# Altium PCB BASE.PcbDoc (part 5 of 5)
Units mil, origin at the board's own origin, x right, y up, seen from the top; angles counter-clockwise.
Board outline 4330.71 x 3937.01 mil, 6 copper layers (Top, GND1, SIG1, PWR, GND2, Bottom), stack 32.112 mil thick; 57 components, 250 nets, 665 pads, 350 vias.
Unrouted connection lines stored in the file: 2.
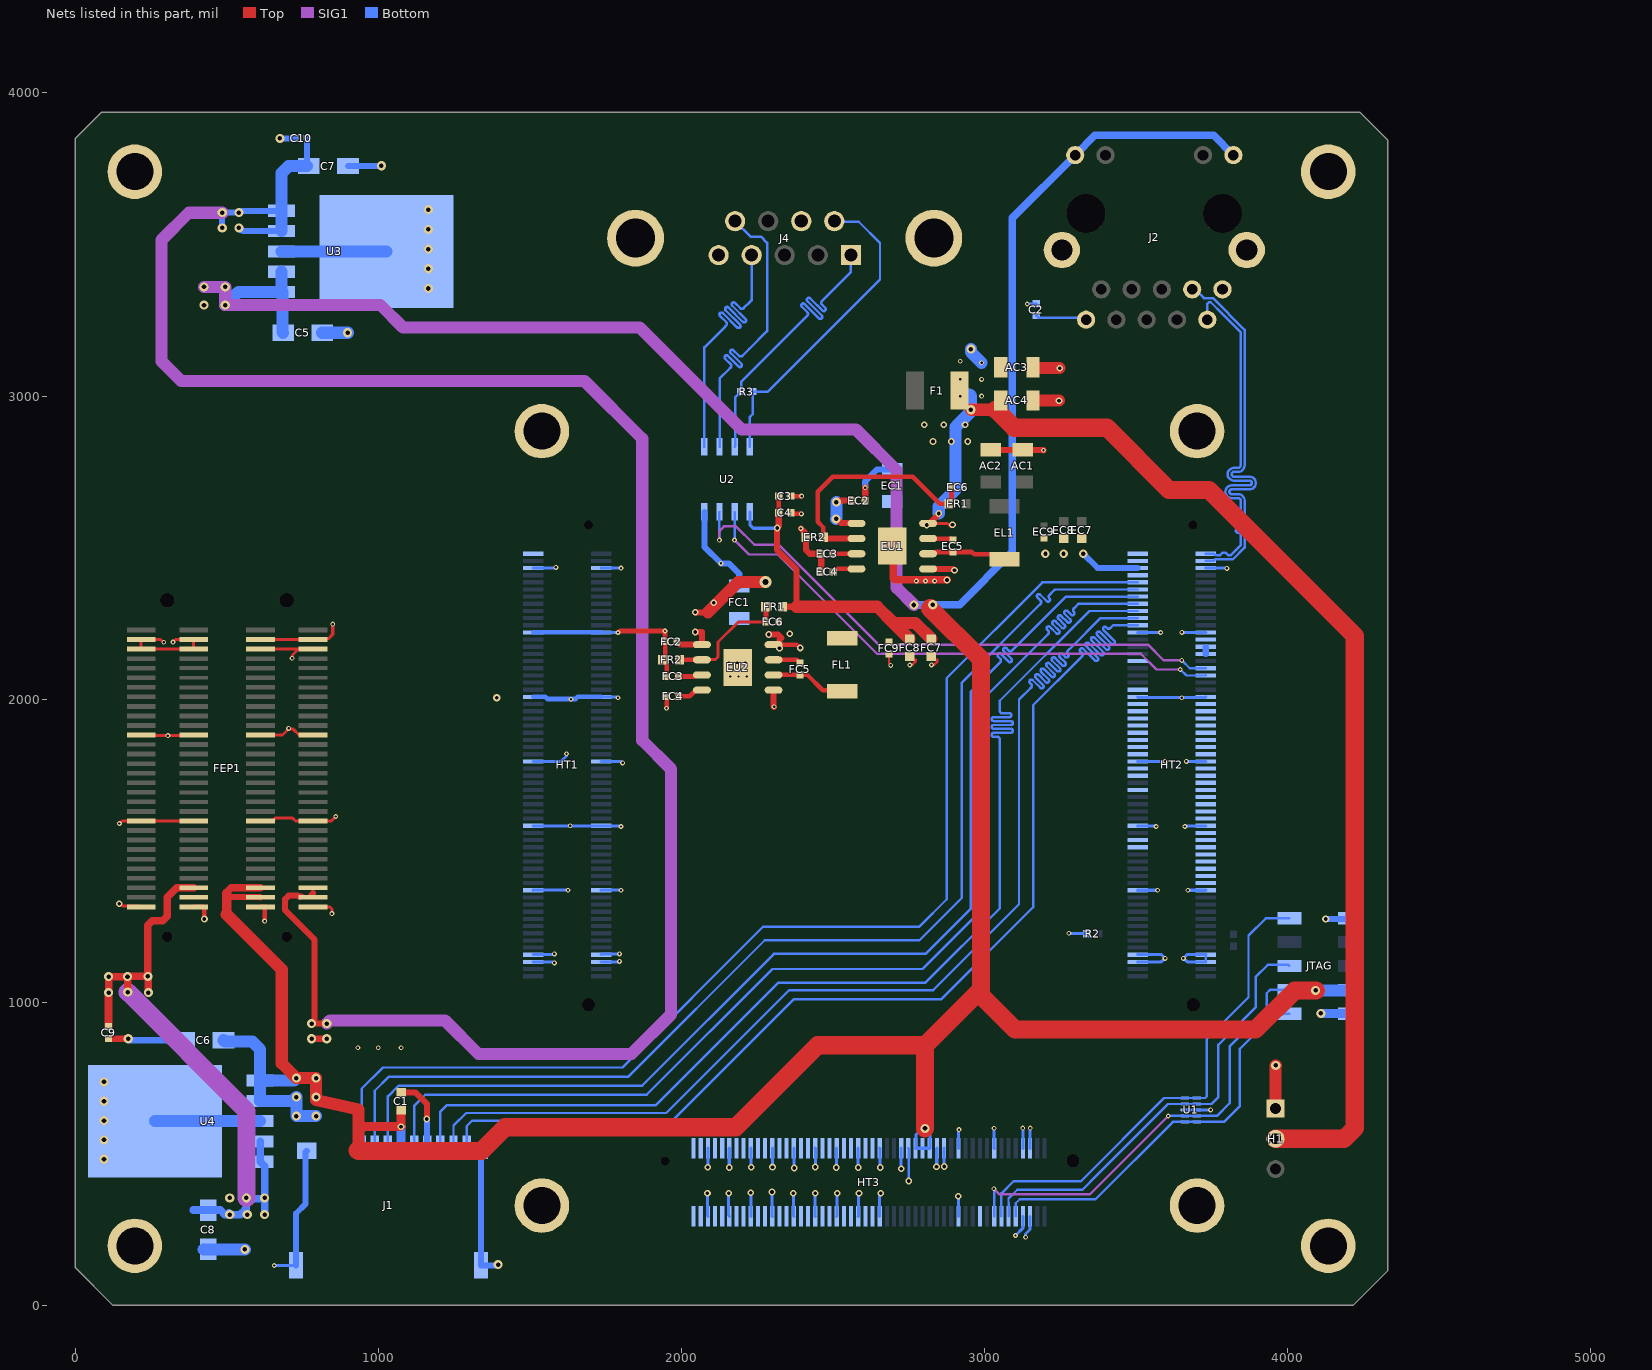
[diagram p9: the nets of this part, all layers, seen from the top]

## Via types
v1: diameter 16, hole 8, Top to Bottom, 219 vias
v2: diameter 30, hole 15, Top to Bottom, 75 vias
v3: diameter 22, hole 12, Top to Bottom, 48 vias
v4: diameter 28, hole 14, Top to Bottom, 3 vias
v5: diameter 39.37, hole 39.37, Top to Bottom, 2 vias
v6: diameter 24, hole 12, Top to Bottom, 2 vias
v7: diameter 40, hole 20, Top to Bottom, 1 vias

## Nets (pads, with @x,y where several pads share a name; then routed paths per layer and width w, separated by ;. In a path a pad name is that pad's centre, name@x,y a point inside that pad or via, vN(x,y) a via of type N, cw(c..) or ccw(c..) an arc to the next point about the centre after c; other vN are vias at no path point) (continued)
ETH-TD3_N: HT2.B60 J2.9 | length 1301.1
  Bottom w8: HT2.B60@3729.61,2480.08 3756.18,2480.08 3759.07,2477.19 3762,2477.19 3763.76,2475.44 3776.88,2475.44 3784.2,2482.75 3795.86,2482.75 3804.29,2474.32 3810.92,2474.32 3845.71,2509.12 3845.71,2537.44 3845.71,2541.44 ccw(c3837.71,2541.44) 3837.71,2549.44 3835.47,2549.44 cw(c3835.47,2555.94) 3835.47,2562.44 3839.21,2562.44 ccw(c3839.21,2568.94) 3839.21,2575.44 3835.47,2575.44 cw(c3835.47,2581.94) 3835.47,2588.44 3837.71,2588.44 ccw(c3837.71,2596.44) 3845.71,2596.44 3845.71,2615 3845.71,2623.35 3844.89,2624.18 3844.89,2645.26 3844.89,2655.67 ccw(c3836.89,2655.67) 3836.89,2663.67 3815.31,2663.67 cw(c3815.31,2684.49) 3794.49,2684.49 cw(c3815.31,2684.49) 3815.31,2705.32 3873.89,2705.32 ccw(c3873.89,2713.32) 3881.89,2713.32 ccw(c3873.89,2713.32) 3873.89,2721.32 3822.7,2721.32 cw(c3822.7,2742.14) 3801.87,2742.14 cw(c3822.7,2742.14) 3822.7,2762.96 3836.78,2762.96 ccw(c3836.78,2770.96) 3844.78,2770.96 3844.78,2795.81 3844.68,2795.91 3844.68,2809.02 3844.68,3211.03 3783.39,3272.31 3746.2,3309.51 3739.57,3309.51 3734.88,3304.83 J2.9@3734.88,3252.09
ETH-TD3_P: HT2.B59 J2.8 | length 1304
  Bottom w8: J2.8@3684.88,3352.09 3694.3,3352.09 3723.31,3323.08 3753.02,3323.08 3857.71,3218.39 3857.71,2809.02 3857.71,2795.91 3857.6,2795.81 3857.6,2770.96 cw(c3836.78,2770.96) 3836.78,2750.14 3822.7,2750.14 ccw(c3822.7,2742.14) 3814.7,2742.14 ccw(c3822.7,2742.14) 3822.7,2734.14 3873.89,2734.14 cw(c3873.89,2713.32) 3894.72,2713.32 cw(c3873.89,2713.32) 3873.89,2692.49 3815.31,2692.49 ccw(c3815.31,2684.49) 3807.31,2684.49 ccw(c3815.31,2684.49) 3815.31,2676.49 3836.89,2676.49 cw(c3836.89,2655.67) 3857.71,2655.67 3857.71,2645.26 3857.71,2500.03 3819.62,2461.94 3761.66,2461.94 3756.18,2456.46 HT2.B59@3729.61,2456.46
ETH_MDC: HT2.B38
ETH_MDIO: HT2.B39
ETHA_RXCK: HT2.B35
ETHA_RXCTL: HT2.B26
ETHA_RXD0: HT2.B27
ETHA_RXD1: HT2.B34
ETHA_RXD2: HT2.B28
ETHA_RXD3: HT2.B29
ETHA_TXCK: HT2.A38
ETHA_TXCTL: HT2.B37
ETHA_TXD0: HT2.B32
ETHA_TXD1: HT2.B33
ETHA_TXD2: HT2.A39
ETHA_TXD3: HT2.B36
ETHB_MDC: HT2.A19
ETHB_MDIO: HT2.A20
ETHB_RXCK: HT2.B30
ETHB_RXCTL: HT2.B14
ETHB_RXD0: HT2.B15
ETHB_RXD1: HT2.B16
ETHB_RXD2: HT2.B17
ETHB_RXD3: HT2.B18
ETHB_TXCK: HT2.B21
ETHB_TXCTL: HT2.B25
ETHB_TXD0: HT2.B19
ETHB_TXD1: HT2.B20
ETHB_TXD2: HT2.B23
ETHB_TXD3: HT2.B24
GND: AC1.1 AC2.1 AC3.1 AC4.1 C1.2 C2.1 C3.2 C4.2 C5.2 C6.2 C7.2 C8.2 C9.1 C10.1 EC1.1 EC2.1 EC3.1 EC4.1 EC7.1 EC8.1 EC9.1 ER2.1 EU1.5 EU1.9 EU2.5 EU2.9 FC1.1 FC2.1 FC3.1 FC4.1 FC7.1 FC8.1 FC9.1 FEP1.A2 FEP1.A3 FEP1.A12 FEP1.A21 FEP1.A30 FEP1.B2 FEP1.B3 FEP1.B12 FEP1.B21 FEP1.B30 FEP1.C2 FEP1.C3 FEP1.C12 FEP1.C21 FEP1.C30 FEP1.D2 FEP1.D3 FEP1.D12 FEP1.D21 FEP1.D30 FR2.1 H1.1 HT1.A3 HT1.A4 HT1.A13 HT1.A22 HT1.A31 HT1.A40 HT1.A49 HT1.A58 HT1.B3 HT1.B4 HT1.B13 HT1.B22 HT1.B31 HT1.B40 HT1.B49 HT1.B58 HT2.A3 HT2.A4 HT2.A13 HT2.A22 HT2.A31 HT2.A40 HT2.A49 HT2.A58 HT2.B3 HT2.B4 HT2.B13 HT2.B22 HT2.B31 HT2.B40 HT2.B49 HT2.B58 HT3.A3 HT3.A4 HT3.A13 HT3.A24 HT3.A27 HT3.A30 HT3.A33 HT3.A36 HT3.A39 HT3.A42 HT3.A45 HT3.A48 HT3.B3 HT3.B4 HT3.B8 HT3.B13 HT3.B15 HT3.B16 HT3.B20 HT3.B21 HT3.B24 HT3.B27 HT3.B30 HT3.B33 HT3.B36 HT3.B39 HT3.B42 HT3.B45 HT3.B48 J1.0 J1.6 J1.10 J1.11 J1.12 J2.10 J2.15 J2.16 J4.5 J4.7 J4.10 J4.11 JTAG.2 JTAG.10 pad.19 pad.20 pad.21 pad.22 pad.C1 pad.C2 pad.C3 pad.C4 R2.2 U1.3 U1.8 U2.4 U3.3 U3.6 U4.3 U4.6 | length 12165.5
  Top w8: FC9.1@2684.61,2149.17 2684.61,2119.64 2690.61,2113.64 v1(2690.61,2111.48) ; FC8.1@2752.52,2141.46 2763.28,2130.69 2772.27,2130.69 2772.27,2125.04 2760.01,2112.78 v1(2753.45,2112.78) ; FC7.1@2824.61,2141.46 2835.38,2130.69 2844.36,2130.69 2844.36,2125.04 2832.63,2113.3 v1(2824.9,2113.3)
  Top w10: v3(145.71,1325) 148.96,1325 156.12,1317.83 214.61,1317.83 FEP1.D30@217.48,1314.96 ; v1(145.71,1590) 154.13,1598.43 FEP1.D21@217.48,1598.43 FEP1.C21@390.71,1598.43 ; FEP1.D12@217.48,1881.89 218.43,1880.94 389.76,1880.94 FEP1.C12@390.71,1881.89 ; v1(292.16,2187.98) 290.53,2187.98 281.66,2196.85 FEP1.D2@217.48,2196.85 FEP1.D3@217.48,2165.35 FEP1.C3@390.71,2165.35 FEP1.C2@390.71,2196.85 331.41,2196.85 322.92,2188.36 v1(322.78,2188.36) ; FEP1.B21@611.18,1598.43 650.55,1598.43 659.88,1607.75 717.66,1607.75 726.99,1598.43 FEP1.A21@784.41,1598.43 844.91,1598.43 v1(859.55,1613.07) ; FEP1.B12@611.18,1881.89 683.82,1881.89 703.99,1902.06 v1(703.99,1903.68) 705.14,1902.54 717.82,1902.54 740.3,1880.05 782.57,1880.05 FEP1.A12@784.41,1881.89 ; FEP1.B3@611.18,2165.35 736.53,2165.35 ; FEP1.B2@611.18,2196.85 FEP1.A2@784.41,2196.85 787.28,2199.72 835.43,2199.72 849.67,2213.96 v1(849.67,2247.6) ; v1(715.71,2135) 716.86,2136.15 716.86,2145.68 736.53,2165.35 ; FEP1.A30@784.41,1314.96 784.98,1314.39 840.17,1314.39 846.89,1307.67 v1(846.89,1292.75) ; FEP1.A3@784.41,2165.35 736.53,2165.35
  Top w15: FEP1.C30@390.71,1314.96 424.08,1314.96 427.66,1311.38 426.32,1310.04 v3(426.32,1274.81) ; FEP1.B30@611.18,1314.96 629.37,1314.96 629.75,1314.59 624.87,1309.71 v1(624.87,1268.06) ; v1(1790.71,2220) 1790.98,2220 1795.98,2225 v1(1945.71,2225) 1945.71,2190.31 FC2.1@1946.02,2190 1946.02,2139.84 1937.17,2130.98 FR2.1@1937.17,2130 1937.17,2129.02 1951.02,2115.16 FC3.1@1951.02,2075 ; v1(1950.71,1970) 1951.02,1970.31 FC4.1@1951.02,2010 ; C4.2@2360.39,2615 2363.89,2611.5 v1(2395.65,2611.5) ; C3.2@2360.39,2670 C3.2@2360.39,2670 v1(2396.53,2669.96)
  Top w20: C9.1@110,880.31 110.31,880 v2(175,880) ; C1.2@1075,702.09 1122.91,702.09 1160,665 v3(1160,615) ; EU2.5@2303.82,2030 2303.82,1976.89 v1(2305.71,1975) ; v1(2393.9,2563.13) 2406.69,2550.34 2406.69,2539.76 ER2.1@2411.46,2535 2411.46,2491.72 2423.17,2480 EC3.1@2461.02,2480 2461.18,2479.84 2461.18,2420.16 EC4.1@2461.34,2420 ; EC2.1@2605.39,2655 2606.35,2655.95 v1(2606.35,2698.16) ; EU1.5@2813.82,2430 2895.71,2430 v3(2900.71,2425) ; AC2.1@3020.71,2822.83 AC1.1@3125.71,2822.83 3192.87,2822.83 v1(3194.29,2821.42)
  Top w25: EU1.9@2695.71,2505 2698.21,2502.5 2698.21,2398.85 2703.61,2393.45 v3(2876.02,2393.45)
  Top w40: AC4.1@3159.61,2985.47 3245.24,2985.47 v3(3245.71,2985) ; AC3.1@3159.61,3095.47 3159.61,3091.65 3161.26,3090 3163.56,3092.3 v3(3247.63,3092.3) ; H1.1@3960,650 3960,659.23 3959.7,659.53 3959.7,790.85 v2(3960.67,791.81)
  Bottom w8: HT3.B20@2748.5,518.66 2750.21,516.95 v3(2750.21,410.47) ; v1(3140.85,3303.88) 3141.66,3304.69 C2.1@3170.71,3304.69 ; HT2.B3@3729.61,1133.62 HT2.B4@3729.61,1157.24
  Bottom w10: v1(656.77,131.77) 657.36,132.36 J1.11@728.46,132.36 ; HT1.A3@1510.71,1133.62 1575.46,1133.62 1579.09,1130 v1(1580.71,1130) ; HT1.A4@1510.71,1157.24 1576.33,1157.24 1579.09,1160 v1(1580.71,1160) ; HT1.A13@1510.71,1369.84 1510.79,1369.92 1625.63,1369.92 v1(1625.71,1370) ; HT1.A22@1510.71,1582.44 HT1.B22@1735.12,1582.44 1798.27,1582.44 v1(1800.71,1580) ; HT1.A31@1510.71,1795.04 1603.03,1795.04 1620.71,1812.72 v1(1620.71,1820) ; HT1.A58@1510.71,2432.83 1581.92,2432.83 1584.09,2435 v1(1585.71,2435) ; HT1.B3@1735.12,1133.62 1794.33,1133.62 v1(1795.71,1135) ; HT1.B4@1735.12,1157.24 1736.73,1158.85 1794.56,1158.85 v1(1795.71,1160) ; HT1.B13@1735.12,1369.84 1735.2,1369.92 1800.63,1369.92 v1(1800.71,1370) ; HT1.B31@1735.12,1795.04 1799.05,1795.04 1804.09,1790 v1(1805.71,1790) ; HT1.B40@1735.12,2007.64 1786.45,2007.64 1789.09,2005 v1(1790.71,2005) ; HT1.B49@1735.12,2220.24 1735.24,2220.12 1790.59,2220.12 v1(1790.71,2220) ; HT1.B58@1735.12,2432.83 1735.27,2432.69 1800.35,2432.69 v1(1800.5,2432.54) ; v3(2085.71,370) 2086.4,369.31 2086.4,294.94 HT3.A48@2087.09,294.25 ; v3(2086.78,456.49) 2086.94,456.64 2086.94,518.51 HT3.B48@2087.09,518.66 ; v3(2155.53,370.78) 2155.53,296.68 HT3.A45@2157.95,294.25 ; v3(2157.52,455.2) 2157.74,455.41 2157.74,518.44 HT3.B45@2157.95,518.66 ; HT3.A42@2228.82,294.25 v3(2228.79,371.52) ; HT3.B42@2228.82,518.66 2229.29,518.19 2229.29,456.44 v3(2229.75,455.97) ; v3(2298.81,374.14) 2297.97,373.29 2297.97,295.97 HT3.A39@2299.68,294.25 ; HT3.B39@2299.68,518.66 2300.07,518.27 2300.07,456.99 v3(2300.46,456.6) ; v3(2369.04,370) 2369.8,369.25 2369.8,295.01 HT3.A36@2370.55,294.25 ; HT3.B36@2370.55,518.66 2371.49,517.72 2371.49,454.41 v3(2372.43,453.47) ; v3(2441.26,370) v3(2441.26,370) 2441.34,294.33 HT3.A33@2441.42,294.25 ; HT3.B33@2441.42,518.66 2441.65,518.43 2441.65,457.15 v3(2441.89,456.91) ; v3(2510.15,455) 2510.15,456.62 2512.28,458.75 HT3.B30@2512.28,518.66 ; HT3.A30@2512.28,294.25 2512.88,294.85 2512.88,369.4 v3(2513.49,370) ; v3(2582.93,455) 2583.04,455.11 2583.04,518.55 HT3.B27@2583.15,518.66 ; HT3.A27@2583.15,294.25 2584.56,295.66 2584.56,368.85 v3(2585.71,370) ; HT3.A24@2654.02,294.25 2654.02,364.46 2657.93,368.38 v3(2657.93,370) ; HT3.B24@2654.02,518.66 2654.86,517.81 2654.86,455.85 v3(2655.71,455) ; v3(2724.68,451.43) 2724.64,451.47 2724.64,518.42 HT3.B21@2724.88,518.66 ; v3(2841.53,457.36) 2842.26,458.09 2842.26,517.93 HT3.B16@2842.99,518.66 ; v3(2866.5,458.42) 2866.56,458.47 HT3.B15@2866.61,518.66 HT3.B15@2866.61,518.66 ; v3@2910.71,360 2913.86,356.85 HT3.A13@2913.86,294.25 ; HT3.B13@2913.86,518.66 2913.86,578.15 v1(2915.71,580) ; v1(3031.62,584.74) 3031.8,584.57 3031.8,518.83 HT3.B8@3031.97,518.66 ; v1(3102.14,230.84) 3126.08,254.78 3126.08,293.88 HT3.A4@3126.46,294.25 ; v1(3125.71,585) 3126.08,584.63 3126.08,519.04 HT3.B4@3126.46,518.66 ; v1(3135.32,224.97) 3135.32,235.76 3150.08,250.52 HT3.A3@3150.08,294.25 ; HT3.B3@3150.08,518.66 3150.39,518.98 3150.39,584.68 v1(3150.71,585) ; v1(3278.38,1227.73) 3278.97,1227.14 3336.67,1227.14 R2.2@3337.26,1226.56 ; HT2.A3@3505.2,1133.62 3582.71,1133.62 3594.09,1145 v1(3595.71,1145) 3583.46,1157.24 HT2.A4@3505.2,1157.24 ; HT2.A13@3505.2,1369.84 3570.55,1369.84 v1(3570.71,1370) ; HT2.A22@3505.2,1582.44 3563.27,1582.44 v1(3565.71,1580) ; HT2.A31@3505.2,1795.04 v1@3595.69,1795.02 ; HT2.A40@3505.2,2007.64 3506.69,2006.15 3649.56,2006.15 v1(3650.71,2005) 3651.86,2006.15 3728.12,2006.15 HT2.B40@3729.61,2007.64 ; HT2.A49@3505.2,2220.24 3505.31,2220.12 3580.59,2220.12 v1(3580.71,2220) ; v1@3650.71,2220 v1(3650.94,2220.24) HT2.B49@3729.61,2220.24 ; v1(3660.71,1580) 3663.15,1582.44 HT2.B22@3729.61,1582.44 ; U1.3@3661.02,645 U1.8@3700.39,645 v1(3745.71,645) ; v1(3665.71,1795) 3665.75,1795.04 HT2.B31@3729.61,1795.04 ; v1(3670.71,1370) 3670.87,1369.84 HT2.B13@3729.61,1369.84 ; HT2.B3@3729.61,1133.62 3668.71,1133.62 3657.33,1145 v1(3655.71,1145) 3667.95,1157.24 HT2.B4@3729.61,1157.24 ; HT2.B58@3729.61,2432.83 3797.87,2432.83 v1@3800.71,2430
  Bottom w15: HT1.A40@1510.71,2007.64 1550.25,2007.64 1557.1,2000.79 1651.49,2000.79 1658.35,2007.64 HT1.B40@1735.12,2007.64 ; HT1.A49@1510.71,2220.24 HT1.B49@1735.12,2220.24
  Bottom w20: v2(175,880) 177.71,880 182.71,875 C6.2@360,875 ; v2(675,3850) C10.1@725.32,3850 ; J1.11@728.46,132.36 728.46,303.46 760,335 760,506.42 J1.12@763.9,510.32 ; C7.2@900,3759 1009,3759 v2(1010,3760) ; v3(1160,615) 1160.38,614.62 1160.38,531.15 J1.6@1161.54,530 ; J1.10@1338.7,510.32 J1.0@1338.7,132.36 1392.36,132.36 v2(1395,135) ; U2.4@2075.71,2617.75 2075.71,2502.74 v1(2130.55,2447.9) 2156.09,2447.9 2190.71,2413.28 FC1.1@2190.71,2373.15 ; v1(2606.35,2698.16) 2606.35,2718.55 2645.94,2758.15 EC1.1@2695.71,2758.15 ; v4(3325.71,2480) 3372.87,2432.83 HT2.A58@3505.2,2432.83 ; v6(4125.71,1275) 4203.23,1275 JTAG.10@4205.71,1277.48
  Bottom w30: v2(4109.25,963.35) 4204.88,963.35 JTAG.2@4205.71,962.52
  Bottom w40: U4.6@263.5,608 U4.3@610,608 ; C8.2@424,185 v2(560,185) ; U3.3@680.72,3477.23 U3.6@1027.22,3477.23 ; C5.2@815,3209 v2(899,3209)
  other v1: 932.77,850.08 1000,850 1075,850 1633.05,1582.84 3595.71,1795 305.71,1880 1635.71,2000 2160.71,2075 2188.21,2075 2215.71,2075 2155.71,2120 2183.4,2120 2211.09,2120 2775,2390 2805,2390 2835,2390 3799.29,2431.42
  other v2: 95,482.5 95,546.25 95,610 95,673.75 95,737.5 1165,3355 1165,3420 1165,3485 1165,3550 1165,3615
  other v3: 2912.76,360.39
  other v4: 3200.71,2480 3260.71,2480
  other v6: 1390.71,2005
H1_HPD: HT1.A60
HDMI1_FPGA_CLK_N: HT2.A36
HDMI1_FPGA_CLK_P: HT2.A37
HDMI1_FPGA_D0_N: HT2.A29
HDMI1_FPGA_D0_P: HT2.A30
HDMI1_FPGA_D1_N: HT2.A32
HDMI1_FPGA_D1_P: HT2.A33
HDMI1_FPGA_D2_N: HT2.A34
HDMI1_FPGA_D2_P: HT2.A35
LED5: HT2.A41
MGT112CLK0_N: HT3.B49
MGT112CLK0_P: HT3.B50
NetC2_2: C2.2 J2.1 | length 169.7
  Bottom w8: C2.2@3170.71,3265.31 3177.32,3258.7 3328.27,3258.7 J2.1@3334.88,3252.09
NetEC3_2: EC3.2 EU1.3 | length 77.2
  Top w15: EC3.2@2500.39,2480 EU1.3@2577.6,2480
NetEC4_2: EC4.2 EU1.4 | length 81
  Top w15: EC4.2@2500.71,2420 2510.71,2430 EU1.4@2577.6,2430
NetEC5_1: EC5.1 EU1.7 | length 84
  Top w15: EU1.7@2813.82,2530 2890.71,2530 EC5.1@2895.71,2525
NetEC5_2: EC5.2 EL1.1 EU1.6 | length 264.3
  Top w15: EU1.6@2813.82,2480 2833.87,2480 2839.5,2485.63 EC5.2@2895.71,2485.63 2957.57,2485.63 2965.66,2477.54 3049.59,2477.54 EL1.1@3065.71,2461.42
NetEC6_1: EC6.1 ER1.2 ER2.2 EU1.2 | length 816.6
  Top w15: ER2.2@2468.54,2535 2468.54,2566.46 2450,2585 2450,2685 2499.48,2734.48 2762.47,2734.48 2852.24,2644.71 2881.88,2644.71 ER1.2@2882.17,2645 ; ER1.2@2882.17,2645.98 2889.43,2653.25 2889.43,2660.63 2890.83,2662.03 2890.83,2695.69 2891.02,2695.88 EC6.1@2891.02,2700
  Top w20: ER2.2@2468.54,2535 2468.54,2534.76 2473.31,2530 EU1.2@2577.6,2530
NetEU2_2: EU2.2 FC6.1 FR1.2 FR2.2 | length 418.1
  Top w10: EU2.2@2068.81,2131.21 2112.02,2131.21 2120.81,2140 2120.81,2188.48 2187.33,2255 FC6.1@2280.71,2255
  Top w15: FR2.2@1994.25,2130 EU2.2@2067.6,2130 EU2.2@2068.81,2131.21 ; FR1.2@2277.17,2305 2278.94,2303.23 2278.94,2256.77 FC6.1@2280.71,2255
NetEU2_3: EU2.3 FC3.2 | length 79.3
  Top w15: FC3.2@1990.39,2075 2042.55,2075 2047.55,2080 EU2.3@2067.6,2080
NetEU2_4: EU2.4 FC4.2 | length 85.5
  Top w15: FC4.2@1990.39,2010 2027.55,2010 2047.55,2030 EU2.4@2067.6,2030
NetEU2_6: EU2.6 FC5.2 FL1.1 | length 249.1
  Top w15: EU2.6@2303.82,2080 FC5.2@2390.71,2080 2415.71,2080 2466.21,2029.5 2527.62,2029.5 FL1.1@2530.71,2026.42
NetEU2_7: EU2.7 FC5.1 | length 91.3
  Top w15: EU2.7@2303.82,2130 2380.08,2130 FC5.1@2390.71,2119.37
OTG-ID: HT2.A57
OTG-RESETN: HT2.B48
PCIE_CLK_N: HT3.A49
PCIE_CLK_P: HT3.A50
PCIE_PG: HT2.A27
PCIE_RX0_N: HT3.B37
PCIE_RX0_P: HT3.B38
PCIE_RX1_N: HT3.B40
PCIE_RX1_P: HT3.B41
PCIE_RX2_N: HT3.B43
PCIE_RX2_P: HT3.B44
PCIE_RX3_N: HT3.B46
PCIE_RX3_P: HT3.B47
PCIE_TX0_N: HT3.A37
PCIE_TX0_P: HT3.A38
PCIE_TX1_N: HT3.A40
PCIE_TX1_P: HT3.A41
PCIE_TX2_N: HT3.A43
PCIE_TX2_P: HT3.A44
PCIE_TX3_N: HT3.A46
PCIE_TX3_P: HT3.A47
PS_RST: HT2.A45
RXD+: J4.6 R3.1 U2.8 | length 1060.3
  Bottom w8: U2.8@2225.71,2832.25 2225.71,2931.31 2235.08,2940.69 R3.1@2235.08,3015 2285,3015 2655,3385 2655,3505 2585,3575 2506.18,3575 J4.6@2504.29,3576.89
RXD-: J4.1 R3.2 U2.7 | length 1060
  Bottom w8: U2.7@2175.71,2832.25 2177.78,2834.32 2177.78,2997.07 R3.2@2195.71,3015 ; R3.2@2196.67,3015.96 2196.67,3046.67 2412.5,3262.5 2415.33,3265.33 ccw(c2409.67,3270.99) 2415.33,3276.64 2397.3,3294.67 cw(c2401.89,3299.27) 2406.49,3303.87 2453.87,3256.49 ccw(c2458.46,3261.09) 2463.06,3265.68 2415.68,3313.06 cw(c2420.28,3317.65) 2424.87,3322.25 2464.84,3282.29 ccw(c2469.43,3286.89) 2474.03,3291.48 2463.41,3302.1 cw(c2469.07,3307.76) 2463.41,3313.41 2490,3340 2558.82,3408.82 J4.1@2558.82,3465.08
SATA1_RX_N: HT3.B31
SATA1_RX_P: HT3.B32
SATA1_TX_N: HT3.A31
SATA1_TX_P: HT3.A32
SATA2_RX_N: HT3.B34
SATA2_RX_P: HT3.B35
SATA2_TX_N: HT3.A34
SATA2_TX_P: HT3.A35
SD_CD_L: HT2.A50 J1.9 | length 3864
  Bottom w8: J1.9@1291.46,530 1291.46,591.46 1310,610 1970,610 2370,1010 2856.49,1010 3160,1313.51 3160,1980 3318.13,2138.13 3320.96,2140.96 ccw(c3315.3,2146.62) 3320.96,2152.27 3316.31,2156.92 cw(c3320.9,2161.52) 3325.5,2166.12 3363.71,2127.9 ccw(c3368.31,2132.5) 3372.9,2137.1 3334.69,2175.31 cw(c3339.29,2179.9) 3343.88,2184.5 3382.1,2146.29 ccw(c3386.69,2150.88) 3391.29,2155.48 3353.08,2193.69 cw(c3357.67,2198.29) 3353.08,2202.89 cw(c3357.67,2198.29) 3362.27,2202.89 3400.48,2164.67 ccw(c3405.08,2169.27) 3409.67,2173.86 3371.46,2212.08 cw(c3376.06,2216.67) 3380.65,2221.27 3418.87,2183.06 ccw(c3423.46,2187.65) 3428.06,2192.25 3392.48,2227.82 cw(c3397.08,2232.42) 3401.68,2237.02 3403.69,2235 ccw(c3409.35,2240.66) 3415,2235 3423.86,2243.86 3437.4,2243.86 HT2.A50@3505.2,2243.86
SFPA_RD_N: HT3.B28
SFPA_RD_P: HT3.B29
SFPA_TD_N: HT3.A28
SFPA_TD_P: HT3.A29
SFPB_RD_N: HT3.B25
SFPB_RD_P: HT3.B26
SFPB_TD_N: HT3.A25
SFPB_TD_P: HT3.A26
TCK_JTAG: HT3.A5 JTAG.1 U1.1 U1.10 | length 1315.2
  Bottom w8: HT3.A5@3102.83,294.25 3102.83,337.13 3115.94,350.23 3365.94,350.23 3621.34,605.63 U1.1@3661.02,605.63 U1.10@3700.39,605.63 3789.84,605.63 3842.49,658.28 3842.49,846.78 3958.23,962.52 JTAG.1@4005.71,962.52
TDI_JTAG: HT3.A7 JTAG.9 U1.5 U1.6 | length 1631.9
  Bottom w8: HT3.A7@3055.59,294.25 3055.59,369.88 3095.53,409.82 3317.69,409.82 3592.24,684.37 U1.5@3661.02,684.37 3728.1,684.37 3733.17,689.43 3733.17,879.08 3870.75,1016.66 3870.75,1220.04 3928.19,1277.48 JTAG.9@4005.71,1277.48
TDO_JTAG: HT3.A8 JTAG.3 U1.2 U1.9 | length 1494.5
  SIG1 w8: v1(3030.71,385) 3049.3,366.41 3347.12,366.41 v1(3605.71,625)
  Bottom w8: v1(3030.71,385) 3031.97,383.74 HT3.A8@3031.97,294.25 ; v1(3605.71,625) 3606.02,625.31 U1.2@3661.02,625.31 U1.9@3700.39,625.31 3766.63,625.31 3808.44,667.12 3808.44,854.06 3930.71,976.33 3930.71,1030 3941.97,1041.26 JTAG.3@4005.71,1041.26
TF_CLK: HT2.A53 J1.5 | length 3864
  Bottom w8: J1.5@1118.23,530 1118.23,658.23 1155,695 1885,695 2300,1110 2795,1110 2995,1310 2995,2000 3206.84,2211.84 3209.67,2214.67 ccw(c3204.01,2220.33) 3209.67,2225.98 3206.66,2229 cw(c3211.25,2233.59) 3215.85,2238.19 3236.26,2217.78 ccw(c3240.86,2222.37) 3245.46,2226.97 3225.04,2247.38 cw(c3229.64,2251.98) 3234.23,2256.58 3254.65,2236.16 ccw(c3259.24,2240.76) 3263.84,2245.36 3243.43,2265.77 cw(c3248.02,2270.36) 3243.43,2274.96 cw(c3248.02,2270.36) 3252.62,2274.96 3273.03,2254.55 ccw(c3277.63,2259.14) 3282.22,2263.74 3264.56,2281.41 cw(c3269.15,2286) 3273.75,2290.6 3285.33,2279.02 ccw(c3289.93,2283.61) 3294.52,2288.21 cw(c3300.18,2293.87) 3294.52,2299.52 3308.44,2313.44 3309.72,2314.72 HT2.A53@3505.2,2314.72
TF_CMD: HT2.A54 J1.3 | length 3857.8
  Bottom w8: J1.3@1031.61,530 1031.61,690 1066.61,725 1870,725 2305,1160 2805,1160 2955,1310 2955,2025 3049.11,2119.11 3051.94,2121.94 ccw(c3046.29,2127.6) 3051.94,2133.26 3044.91,2140.29 cw(c3049.51,2144.89) 3054.1,2149.48 3079.33,2124.26 ccw(c3083.93,2128.85) 3088.52,2133.45 3063.3,2158.67 cw(c3067.89,2163.27) 3072.49,2167.87 3079.52,2160.83 ccw(c3085.18,2166.49) 3090.83,2160.83 3114.11,2184.11 3268.35,2338.35 HT2.A54@3505.2,2338.35
TF_DAT0: HT2.A52 J1.7 | length 3864
  Bottom w8: J1.7@1204.84,530 1204.84,640 1224.84,660 1915,660 2320,1065 2805,1065 3050,1310 3050,1864 3050,1868 ccw(c3042,1868) 3042,1876 3030,1876 cw(c3030,1882.5) 3030,1889 3086.83,1889 ccw(c3086.83,1895.5) 3086.83,1902 3030,1902 cw(c3030,1908.5) 3030,1915 3086.83,1915 ccw(c3086.83,1921.5) 3086.83,1928 3030,1928 cw(c3030,1934.5) 3030,1941 3081.75,1941 ccw(c3081.75,1947.5) 3081.75,1954 3058,1954 cw(c3058,1962) 3050,1962 3050,1995 3346.1,2291.1 HT2.A52@3505.2,2291.1
TF_DAT1: HT2.A51 J1.8 | length 3864
  Bottom w8: J1.8@1248.15,530 1248.15,593.15 1290,635 1950,635 2355,1040 2830,1040 3113.65,1323.65 3113.65,1998.65 3150.7,2035.7 3153.53,2038.53 ccw(c3147.87,2044.19) 3153.53,2049.84 3149.94,2053.44 cw(c3154.53,2058.03) 3159.13,2062.63 3183.65,2038.11 ccw(c3188.25,2042.7) 3192.84,2047.3 3168.32,2071.82 cw(c3172.92,2076.42) 3177.51,2081.01 3202.04,2056.49 ccw(c3206.63,2061.09) 3211.23,2065.68 3186.71,2090.21 cw(c3191.3,2094.8) 3186.71,2099.4 cw(c3191.3,2094.8) 3195.9,2099.4 3220.42,2074.88 ccw(c3225.02,2079.47) 3229.61,2084.07 3205.09,2108.59 cw(c3209.69,2113.19) 3214.28,2117.78 3238.81,2093.26 ccw(c3243.4,2097.86) 3248,2102.45 3223.48,2126.98 cw(c3228.07,2131.57) 3232.67,2136.17 3257.19,2111.65 ccw(c3261.79,2116.24) 3266.38,2120.84 3247.62,2139.6 cw(c3252.21,2144.2) 3256.81,2148.8 3265.96,2139.65 ccw(c3270.56,2144.24) 3275.15,2148.84 cw(c3280.81,2154.5) 3275.15,2160.15 3289.42,2174.42 3382.48,2267.48 HT2.A51@3505.2,2267.48
TF_DAT2: HT2.A56 J1.1 | length 3864.8
  Bottom w8: J1.1@945,530 945,715 1015,785 1805,785 2270,1250 2785,1250 2875,1340 2875,2070 3190.59,2385.59 HT2.A56@3505.2,2385.59
TF_DAT3: HT2.A55 J1.2 | length 3864
  Bottom w8: J1.2@988.31,530 988.31,708.31 1035,755 1825,755 2275,1205 2785,1205 2925,1345 2925,2055 3181.59,2311.59 3184.42,2314.42 ccw(c3178.76,2320.08) 3184.42,2325.73 3174.54,2335.61 cw(c3179.13,2340.21) 3183.73,2344.81 3204.93,2323.61 ccw(c3209.52,2328.21) 3214.12,2332.8 cw(c3219.77,2338.46) 3214.12,2344.12 3230,2360 3231.97,2361.97 HT2.A55@3505.2,2361.97
TMS_JTAG: HT3.A6 JTAG.5 U1.4 U1.7 | length 1466.3
  Bottom w8: HT3.A6@3079.21,294.25 3079.21,339.72 3079.02,339.91 3079.02,353.31 3107.7,381.99 3322.7,381.99 3370.71,430 3605.39,664.68 U1.4@3661.02,664.68 U1.7@3700.39,664.68 3748.34,664.68 3771.25,687.6 3771.25,860.2 3894,982.95 3894,1083.53 3933.95,1123.48 4002.23,1123.48 JTAG.5@4005.71,1120
TXD+: J4.4 U2.5 | length 1060
  Bottom w8: U2.5@2075.71,2832.25 2075.71,3160.71 2145,3230 2147.83,3232.83 ccw(c2142.17,3238.49) 2147.83,3244.14 2127.3,3264.67 cw(c2131.89,3269.27) 2136.49,3273.87 2183.87,3226.49 ccw(c2188.46,3231.09) 2193.06,3235.68 2145.68,3283.06 cw(c2150.28,3287.65) 2154.87,3292.25 2202.25,3244.87 ccw(c2206.85,3249.47) 2211.44,3254.07 2167.51,3298 cw(c2172.1,3302.6) 2167.51,3307.2 cw(c2172.1,3302.6) 2176.7,3307.2 2193.79,3290.1 ccw(c2199.45,3295.76) 2205.1,3290.1 2226,3311 2231.65,3316.65 J4.4@2231.65,3465.08
TXD-: J4.9 U2.6 | length 1054.9
  Bottom w8: U2.6@2125.71,2832.25 2125.71,3057.5 2159.43,3091.22 2162.26,3094.05 ccw(c2156.6,3099.71) 2162.26,3105.37 2144.23,3123.4 cw(c2148.83,3127.99) 2153.42,3132.59 2188.45,3097.56 ccw(c2193.05,3102.16) 2197.64,3106.75 2162.62,3141.78 cw(c2167.21,3146.38) 2171.81,3150.98 2189.84,3132.94 ccw(c2195.5,3138.6) 2201.15,3132.94 2224.17,3155.96 2282.72,3214.51 2282.72,3505.45 2261.93,3526.23 2227.78,3526.23 J4.9@2177.13,3576.89
UART_RXD: HT2.B44 U2.3 | length 1927.7
  SIG1 w8: v1(2125,2525) 2125,2555 2140,2570 2180,2570 2240,2510 2320,2510 2650,2180 3539.05,2180 3590.9,2128.15 v1(3650.71,2128.15)
  Bottom w8: v1(2125,2525) 2125.35,2525.35 2125.35,2617.4 U2.3@2125.71,2617.75 ; v1(3650.71,2128.15) 3676.73,2102.13 HT2.B44@3729.61,2102.13
UART_TXD: HT2.B43 U2.2 | length 1833
  SIG1 w8: v1(2175,2525) 2222.5,2477.5 2317.5,2477.5 2645,2150 3515,2150 3566.85,2098.15 v1(3645.71,2098.15)
  Bottom w8: v1(2175,2525) 2175.71,2525.71 U2.2@2175.71,2617.75 U2.2@2175.6,2617.64 ; v1(3645.71,2098.15) 3665.71,2078.15 3729.25,2078.15 HT2.B43@3729.61,2078.5
USB5V0: HT2.B46 HT2.B47 | length 23.6
  Bottom w20: HT2.B46@3729.61,2149.37 HT2.B47@3729.61,2172.99
USB_5V: HT3.A10
USB_PHY_N: HT2.A59
USB_PHY_P: HT2.A60
VCC1V8: C8.1 C9.2 FEP1.C28 FEP1.C29 U4.4 U4.5 | length 2188.6
  Top w25: C9.2@110,919.69 110,1030 110.27,1030.27 110.27,1084.73 v2(110,1085) v2(172.5,1085) ; v2(173.45,1033.54) 172.97,1034.02 172.97,1084.53 v2(172.5,1085) ; v2(241.31,1032.13) 240.65,1032.78 240.65,1085.18 v2(240,1085.84) ; FEP1.C28@390.71,1377.95 334.88,1377.95 303.25,1346.31 303.25,1283.77 288.6,1269.13 254.64,1269.13 240,1254.48 v2(240,1085.84) ; v2(172.5,1085) 172.92,1085.42 239.58,1085.42 v2(240,1085.84)
  SIG1 w60: v2(173.45,1033.54) 565,641.99 v2(565,355)
  Bottom w25: 390,315 478.65,315 493.65,300 ; v2@496.15,300 512.5,300 v2@507.5,305 ; v2(510,300) 545,300 550,305 565,320 v2(565,355) ; v2@562.5,352.5 v2@622.5,352.5 ; U4.4@610,541 U4.5@610,474 625,459 v2(625,355) v2(625,300)
  other v2: 567.5,300 510,355 110.54,1032.13
VCC2V5: C7.1 C10.2 FEP1.A28 FEP1.A29 U3.4 U3.5 | length 6894.1
  Top w20: FEP1.A29@747.17,1348.58 738.3,1348.58 734.64,1352.25 704.19,1352.25 692.47,1340.53 692.47,1304.54 790,1207.02 790,942.71 ; FEP1.A29@777.27,1352.25 785.02,1360 ; v2(780,880) v2(830,880) ; v2@782.71,930 v2(830,930)
  SIG1 w40: v2(485,3605) 375,3605 285,3515 285,3115 350,3050 1680,3050 1870.8,2859.2 1870.8,1864.2 1965.5,1769.5 1965.5,960 1835.5,830 1330.03,830 1220.03,940 840,940 v2(830,930)
  Bottom w20: v2(485,3555) v2(485,3605) v2(540,3605) 542.71,3605 548.93,3611.23 U3.5@680.72,3611.23 ; v2(540,3555) 542.71,3555 553.48,3544.23 U3.4@680.72,3544.23 ; C10.2@764.69,3850 764.69,3759 764.69,3755.31 766,3754 C7.1@766,3759
  Bottom w40: U3.4@680.72,3544.23 U3.5@680.72,3611.23 680.72,3735.57 704.15,3759 C7.1@764.69,3759
  other v2: 780,930
VCC3V3: C1.1 C3.1 C4.1 C5.1 C6.1 FC6.2 FC7.2 FC8.2 FC9.2 FEP1.B28 FEP1.B29 FL1.2 FR1.1 HT3.B17 HT3.B18 HT3.B19 J1.4 J2.11 J2.14 JTAG.4 U2.1 U3.1 U3.2 U4.1 U4.2 | length 14692.4
  Top w15: C4.1@2321.02,2615 C3.1@2321.02,2670
  Top w16: 503.54,1351.46 507.09,1347.91
  Top w20: 507.09,1347.91 609.72,1347.91 FEP1.B29@611.18,1346.46 ; C4.1@2321.02,2615 2321.02,2570.86 2315.71,2565.54 v3(2315.71,2565) 2315.71,2492.05 2379.81,2427.95 2379.81,2305 FR1.1@2334.25,2305
  Top w25: 500,1360 500,1363.31 514.64,1377.95 FEP1.B28@611.18,1377.95
  Top w30: 500,1290 500,1360 ; 935,572.43 952.57,590 v3(1075,590) C1.1@1075,645 ; FL1.2@2530.71,2201.61 FL1.2@2556.38,2201.61
  Top w40: 500,1290 681.3,1108.7 681.3,798.7 v2(730,750) ; v2@727.96,750 v2(730,750) ; 935,520 935,572.43 935,646.38 795,677.45 v2(795,687.5) v2(795,750) v2(730,750) ; 2379.81,2305 2646.06,2305 2699.29,2251.77 ; FC8.2@2752.52,2198.54 2699.29,2251.77 ; FC7.2@2824.61,2198.54 2771.39,2251.77 2699.29,2251.77
  Top w60: 931,511 935,515 ; 935,510 1340.82,510 1418.71,587.9 2178.99,587.9 2449.49,858.4 2803.4,858.4 ; v2(2803.4,584.1) 2803.4,858.4 ; v2@2820.71,2300 2987.76,2132.94 2987.76,1042.76 ; v2(4092.33,1039.6) 4023.5,1039.6 3893.89,910 3100.71,910 2987.76,1022.94 2987.76,1042.76 ; 2803.4,858.4 2987.76,1042.76
  SIG1 w40: v2(425,3360) v2(495,3360) v2(495,3300) 1007.69,3300 1081.34,3226.35 1862.19,3226.35 2198.54,2890 2575.75,2890 2710,2755.75 2710,2367.85 v2(2766.95,2310.9)
  Bottom w10: U2.1@2225.71,2617.75 2225.71,2575.58 2237.29,2564 2314.71,2564 v3(2315.71,2565) ; HT3.B19@2772.13,518.66 2774.02,520.55 2774.02,564.1 2796.09,586.17 2801.88,586.17 2803.4,584.66 v2(2803.4,584.1) 2819.37,568.12 HT3.B17@2819.37,518.66 HT3.B18@2795.75,518.66 HT3.B19@2772.13,518.66
  Bottom w25: v2(2766.95,2310.9) 2828,2310.9 v2(2828.9,2311.81) 2917.52,2311.81 3091.58,2485.87 3091.58,3587.52 J2.11@3299.06,3795 3364.06,3860 3755.71,3860 J2.14@3820.71,3795
  Bottom w30: J1.4@1074.92,530 1075,530.08 v3(1075,590)
  Bottom w40: C6.1@489,875 493.75,870.25 584.75,870.25 610,845 U4.1@610,742 ; v2(495,3300) 538.23,3343.23 U3.1@680.72,3343.23 ; U3.2@680.72,3410.23 U3.1@680.72,3343.23 ; C5.1@686,3209 683.36,3211.64 683.36,3343.23 U3.1@680.72,3343.23 ; v2(730,750) 722,742 U4.1@610,742 ; v2(795,625) v2(730,625) v2(730,687.5) 717.5,675 U4.2@610,675 U4.1@610,742 ; v2(4092.33,1039.6) 4203.75,1039.6 4205.56,1041.41 JTAG.4@4205.71,1041.26
  other v2: 425,3300
VCC12V: AC3.2 AC4.2 EC1.2 EC2.2 EU1.1 EU1.8 EU2.1 EU2.8 F1.1 FC1.2 FC2.2 H1.2 | length 4914.7
  Top w10: EU1.8@2818.65,2580 2877.46,2580 v3@2887.46,2570
  Top w15: EU2.8@2303.82,2180 2323.34,2180 2380.99,2180 v3(2391.75,2169.24)
  Top w20: FC2.2@1985.39,2190 1995.39,2180 EU2.1@2067.6,2180 2067.6,2221.81 v3(2045.93,2221.81) ; v3(2045.93,2286.81) 2087.52,2286.81 2087.52,2298.56 v3(2106.99,2318.04) ; v3(2287.97,2213.5) 2318.88,2213.5 2330,2202.38 2323.34,2195.72 2323.34,2180 v3(2323.34,2168.34) ; v2(2510,2595) 2512.71,2595 2527.01,2580.69 2576.91,2580.69 EU1.1@2577.6,2580 ; v2(2510.95,2650.1) 2513.65,2650.1 2518.56,2655 EC2.2@2566.02,2655 ; EU1.8@2818.65,2580 2848.77,2610.12 v3(2848.77,2612.57)
  Top w40: 2087.52,2286.81 2187.35,2386.65 v7(2277.45,2386.65) ; v2(2955,2955) AC4.2@3037.51,2955
  Top w60: AC4.2@3037.51,2955 3096.91,2895.6 3403.37,2895.6 3608.97,2690 3739.64,2690 4221.36,2208.28 4221.36,585.15 4186.21,550 H1.2@3960,550
  Bottom w40: v2(2510,2595) 2510.95,2595.95 v2(2510.95,2650.1) ; v3(2848.77,2612.57) 2848.77,2635.56 2904.23,2691.03 2904.23,2898.53 2905.77,2899.94 2955,2949.17 v2(2955,2955) 2955,3000.71 2950.71,3005 ; v2(2955,3155) 2955,3145 v1(2990,3110)
  other v1: 2920,3000 2990,3000 2920,3055 2990,3055 2920,3115
  other v3: 2357.37,2215.8 2809.47,2574.96 2894.01,2575.53 2830,2850 2890,2850 2945,2850 2800.7,2905 2865,2905 2935.7,2905
pads on no net: "J2. " FEP1.0 H1.3 HT1.C1 HT1.C2 HT2.A15 HT2.A17 HT2.A23 HT2.A25 HT2.A43 HT2.A44 HT2.A46 HT2.A47 HT2.A48 HT2.B45 HT2.C1 HT2.C2 HT3.A9 HT3.A11 HT3.A12 HT3.A14 HT3.A15 HT3.A16 HT3.A17 HT3.A18 HT3.A19 HT3.A20 HT3.A21 HT3.A22 HT3.A23 HT3.B5 HT3.B9 HT3.B10 HT3.B11 HT3.B12 HT3.B14 HT3.B22 HT3.B23 HT3.C1 HT3.C2 J4.2 J4.8 JTAG.6 JTAG.7 JTAG.8
copper on no net:
  other v5: 913.5,116.61 1228.46,116.61

## Polygon pours and split planes (outlines as drawn)
5V_IN on Top "5V_IN_L01_P021" (solid, remove dead copper, pour order 21): 95,2280 95,2220 435.71,2220 445.71,2230 445.71,2265 430.71,2280
VCC2V5 on Top "VCC2V5_L01_P051" (solid, remove dead copper, pour order 51): 765,955 840,955 840,865 835,860 765,860 765,950
VCC3V3 on Top "rrrrrr" (solid, remove dead copper, pour order 44): 695,610 830,610 810,610 810,770 695,770
VCC1V8 on Top "VCC1V8_L01_P037" (solid, remove dead copper, pour order 37): 70,1120 80,1130 260,1130 280,1110 280,1015 95,1015 70,1040
VCC12V on Top "VCC12V_L01_P011" (solid, remove dead copper, pour order 11): 2885.71,2935 2865.71,2915 2765,2915 2765,2830 2944.85,2830 3045,2930.15 3045,2935.71 2990.71,2990 2895.71,2990 2895.71,2950
VCC12V on Top "VCC12V_L01_P012" (solid, remove dead copper, pour order 12): 2770.71,2625 2770.71,2565 2860.71,2565 2870.71,2555 2910.71,2555 2910.71,2610 2900.71,2620 2835.71,2620 2835.71,2625 2830.71,2630 2775.71,2630
5V_IN on Top "5V_IN_L01_P001" (solid, remove dead copper, pour order 1): 2915.71,2740 2915.71,2610 3150.71,2610 3175.71,2585 3175.71,2560 3244.49,2560 3249.49,2565 3350.71,2565 3365.71,2580 3365.71,2740 3340.71,2755 2930.71,2755
no net on Top "NONET_L01_P033" (solid, pour order 33): 655,1385
GND on Top "GND_L01_P016" (solid, remove dead copper, pour order 16): 2855.71,2160 2705.71,2160 2665.71,2160 2665.71,2125 2685.71,2105 2845.71,2105 2855.71,2115
VCC3V3 on Top "VCC3V3_L01_P000" (solid, remove dead copper, pour order 0): 2305.71,2329.69 2305.71,2245 2410.71,2245 2485.71,2170 2645.71,2170 2655.71,2180 2845.71,2180 2855.71,2190 2855.71,2329.29 2850,2335 2311.02,2335
no net on Top "NONET_L01_P014" (solid, pour order 14): 2630.71,2700
DC12V_IN on Top "DC12V_IN_L01_P013" (solid, remove dead copper, pour order 13): 2743.7,3079.36 2733.7,3069.36 2728.7,3064.36 2705.71,3041.37 2705.71,2992.35 2723.7,2974.36 2738.7,2959.36 2743.7,2959.36
VCC12V on Top "VCC12V_L01_P009" (solid, remove dead copper, pour order 9): 2265.71,2225 2260.71,2220 2260.71,2160 2375.39,2160 2375.39,2155 2425.71,2155 2425.71,2195 2395.71,2225
VCC12V on Top "VCC12V_L01_P008" (solid, remove dead copper, pour order 8): 2105.71,2410 1970.71,2275 1970.71,2175 1985.71,2160 2090,2160 2090,2244.29 2195.71,2350 2305.71,2350 2305.71,2410
VCC12V on Top "VCC12V_L01_P003" (solid, remove dead copper, pour order 3): 2870.71,3170 3095.71,3170 3106.46,3159.25 3106.46,2940.75 3090.71,2925 2870.71,2925
GND on Top "GND_L01_P002" (solid, remove dead copper, pour order 2): 3170.71,2545 3160.71,2535 3160.71,2445 3360.71,2445 3360.71,2545
VCC3V3 on Bottom "VCC3V3_L06_P048" (solid, remove dead copper, pour order 48): 405,3440 510,3440 510,3420 525,3405 720,3405 720,3185 465,3185 405,3245
VCC2V5 on Bottom "VCC2V5_L06_P047" (solid, remove dead copper, pour order 47): 460,3525 720,3525 720,3640 490,3640 460,3610
VCC12V on Bottom "VCC12V_L06_P007" (solid, remove dead copper, pour order 7): 2667.27,2589.82 2642.27,2589.82 2467.27,2414.82 2252.27,2414.82 2252.27,2330.67 2250.29,2329.82 2197.27,2329.82 2002.27,2329.82 1967.27,2294.82 1967.27,2199.82 2022.27,2144.82 2429.82,2144.82 2699.82,2414.82 2845.22,2414.82 3025.71,2595.31 3025.71,2619.28
VCC3V3 on Bottom "VCC3V3_L06_P045" (solid, pour order 45): 720,775 715,775 825,775 825,600 710,600 710,770
VCC1V8 on Bottom "VCC1V8_L06_P041" (solid, remove dead copper, pour order 41): 565,560 565,270 650,270 650,560
VCC1V8 on Bottom "VCC1V8_L06_P039" (solid, remove dead copper, pour order 39): 615,270 625,270 625,375 405,375 380,350 380,270
VCC12V on Bottom "r" (solid, remove dead copper, pour order 36): 2485,2675 2545,2675 2545,2660 2560,2645 2650,2645 2650,2579.29 2645.71,2575 2485,2575
no net on Bottom "NONET_L06_P035" (solid, pour order 35): 2480,2680
no net on Bottom "NONET_L06_P034" (solid, pour order 34): 2480.71,2558.11
no net on Bottom "NONET_L06_P019" (solid, pour order 19): 3770.71,1120
VCC12V on Bottom "VCC12V_L06_P004" (solid, remove dead copper, pour order 4): 2645.71,2695 2655.71,2705 2775.71,2705 2775.71,2916.16 2824.84,3170 3027.72,3170 3027.72,2617.01 2955.71,2545 2675.71,2545 2645.71,2575
5V_IN on PWR "5V_IN_L04_P031" (solid, remove dead copper, pour order 31): 2795,2785 95,2785 95,2585.01 495,2585 2950.71,2585 2950.71,2750 2915.71,2785
no net on PWR "NONET_L04_P032" (solid, pour order 32): 700.71,1325
5V_IN on PWR "5V_IN_L04_P023" (solid, remove dead copper, pour order 23): 3353.21,2747.5 3345.71,2755 3220.71,2755 3200.71,2735 3200.71,2630 3205.71,2625 3350.71,2625 3350.71,2745 3340.71,2755
VCC3V3 on SIG1 "VCC3V3_L03_P046" (solid, remove dead copper, pour order 46): 2690,2365 2690,2305 2700,2295 2845,2295 2845,2360 2840,2365
VCC1V8 on SIG1 "VCC1V8_L03_P043" (solid, remove dead copper, pour order 43): 435,382.5 615,382.5 645,352.5 645,277.5 455,277.5 435,297.5
VCC1V8 on SIG1 "VCC1V8_L03_P042" (solid, remove dead copper, pour order 42): 82.5,1117.5 82.5,1027.5 95,1015 280,1015 280,1110 260,1130 95,1130
GND on GND1 (split plane): 4310.61,3835.97 4310.61,124.03 4206.68,20.1 133.32,20.1 20.1,133.32 20.1,3841.38 95.63,3916.91 4229.67,3916.91
GND on GND2 (split plane): 4310.61,3835.97 4310.61,124.03 4206.68,20.1 133.32,20.1 20.1,133.32 20.1,3841.38 95.63,3916.91 4229.67,3916.91

## Other copper
Top:
  rectangle net VCC1V8: 345,1345 435,1380
  rectangle net VCC3V3: 562.91,1345 655,1377.95
  rectangle net VCC2V5: 740,1345 830.04,1375
  pour cut-out: 2910.71,2633.19 2910.71,2744.18 2920.71,2754.18 2920.71,2780 2664.89,2780 2592.2,2707.31 2592.2,2626.49 2608.4,2626.49 2613.26,2621.63 2613.26,2581.06 2621.82,2581.06 2699.52,2658.76 2864.47,2658.76 2870.39,2664.69 2872.8,2662.28 2902.93,2662.28 2902.93,2640.97
  pour cut-out: 2106.97,2131.21 2110.76,2135 2270,2135 2270,2220 2260,2230 2105,2230 2105,2133.18
  pour cut-out: 2647.5,2567.5 2760,2567.5 2760,2625 2705,2625
  region: 5085.71,3095
  pour cut-out: 3070.71,2865
  pour cut-out: 2350.6,2695 2350.6,2545 2283.21,2545 2283.21,2695
  pour cut-out: 2665.71,3107.6 2845.47,3107.6 2860.47,3092.6 2860.47,2932.6 2850.47,2922.6 2665.71,2922.6
  pour cut-out: 1615.71,2357.74 1615.71,1075 1355.71,815 895.71,815 895.71,1465 804.32,1556.38 804.32,2131.38 780.71,2155 480.71,2155 480.71,2270 702.04,2491.33 1490.71,2491.33 1490.71,2480 1610.7,2362.76
  pour cut-out: 2630,2399.4 2481.07,2399.4 2480.71,2558.11 2630,2558.11
  pour cut-out: 2890.71,2455 2760,2455 2760,2558.51 2892.2,2558.51 2910.71,2540 2905.71,2535 2905.71,2470
  pour cut-out: 3180.71,2583.32 3180.71,2502.5 3175.71,2502.5 3155.71,2482.5 2920.71,2482.5 2905.71,2497.5 2910.71,2502.5 2910.71,2607.5 3156.52,2607.5
  pour cut-out: 2110.71,1970 1970.71,1970 1970.71,2154.53 1975.24,2150 2110.71,2150
  pour cut-out: 2090.37,2131.21
  pour cut-out: 2610.71,2040 2455.71,2040 2269.32,2040 2269.32,2153.62 2275.71,2160 2360.71,2160 2365.71,2155 2432.2,2155 2432.2,2188.51 2395.71,2225 2325.71,2225 2320.71,2230 2325.71,2235 2325.71,2245 2410.71,2245 2485.71,2170 2610.71,2170
  pour cut-out: 1052.59,2106.79
SIG1:
  rectangle net VCC3V3: 405,3275 515,3380
  rectangle net VCC2V5: 770,865 840,960
  rectangle net VCC2V5: 465,3535 565,3630
  pour cut-out: 3795.71,3205 3290.71,3205 3270.71,3225 3270.71,3400 3805.71,3400 3830.71,3375 3830.71,3240
  pour cut-out: 2995.71,3120
PWR:
  rectangle net 5V_IN: 2940.71,2600 3380.71,2760
  rectangle net 5V_IN: 2925.71,1345 3155.71,2710
  pour cut-out: 2295,2705 2625,2705 2625,2565 2255,2565 2255,2665
  pour cut-out: 715.11,2240 355.71,2240 262.47,2146.77 262.47,1800 715.11,1800
  pour cut-out: 2925.71,2530 2720,2565 2755.71,2665 2920.71,2665 2925.71,2660
  pour cut-out: 1639.12,2517.75 927.81,2517.75 538.13,2128.07 538.13,1985.71 245.64,1693.22 245.64,1571.78 239.9,1571.78 117.71,1449.59 139.46,1427.84 139.46,1215 566.09,1215 1118.07,1215 1639.12,1736.05
Bottom:
  rectangle net 5V_IN: 1701.98,1082.26 1766.98,1107.26
  rectangle net 5V_IN: 1479.13,1083.54 1544.13,1108.54
  pour cut-out: 3534.66,1201.05 3461.73,1201.05 3461.73,2230.4 3475.19,2243.86 3479.05,2240 3540.71,2240 3540.71,1195
  pour cut-out: 3775.71,2240 3745.61,2270.1 3686.14,2270.1 3686.14,1194.57 3690.71,1190 3770.71,1190 3770.71,1200 3775.71,1205
  pour cut-out: 3755.71,1205
  pour cut-out: 2035.71,565 2010.71,540 2015.71,535 2015.71,265 2045.71,235 3200.71,235 3245.71,280 3245.71,565
  pour cut-out: 3110.71,3335 3294.57,3335 3294.57,3225 3120.71,3225 3110.71,3235
  pour cut-out: 3835.71,3390 3825.71,3400 3340.71,3400 3280.71,3340 3280.71,3205 3795.71,3205 3840.71,3250 3840.71,3390
  pour cut-out: 4240.71,1310 4238.19,1307.48 3955.71,1307.48 3955.71,941.78 3972.49,925 4245.71,925 4265.71,945 4265.71,1290 4240.71,1315
  pour cut-out: 3060.39,2630 2835.39,2405 2730.71,2405 2645.71,2320 2645.71,2285 2790.71,2285 2830.71,2325 2925.71,2325 3091.58,2490.87 3091.58,2628.74 3081.97,2628.74 3080.71,2630
  pour cut-out: 2595.28,3375 2165.71,3375 2165.71,3325 2125.71,3285 2165.71,3245 2235.71,3245 2235.71,3150 2075.71,2990 2075.71,2834.75 2090.46,2820 2225.71,2820 2225.71,2931.31 2235.08,2940.69 2235.08,3003.19 2278.41,3003.19 2423.37,3148.15 2578.86,3148.15 2621.89,3191.19 2621.89,3348.48 2621.81,3348.48
  pour cut-out: 3455.74,2755 3125,2755 3125,2615 3455.74,2615
  pour cut-out: 4045.71,1295 4045.71,945 3955.13,945 3852.69,842.56 3852.69,668.47 3789.84,605.63 3785.47,610 3600.71,610 3600.71,630 3580.71,650 3625.27,694.57 3735.27,694.57 3755.71,715 3750.71,720 3750.71,855 3885.71,990 3875.71,1000 3875.71,1230 3930.71,1285 4040.71,1285
  pour cut-out: 3819.73,2291.1 3659.61,2291.1 3568.71,2382 3568.71,2535 3375.71,2728 3380.71,2733 3380.71,3218.05 3819.73,3218.05

## Silkscreen, mask and mechanical layers (free items; w line width, h text height)
Top Overlay:
  text "Sensor Side" at 251.82,3273.02 h90
Bottom Overlay:
  text "MainBoard / 2021.3.10" at 2950.71,1520 h90
Mechanical 1:
  the board outline again, w5

## Text inside footprints (layer, text, board x,y; h text height)
FEP1: Top Overlay "C30" at 355.94,1179.57 h30 r270; Top Overlay "D30" at 220.94,1179.57 h30 r270; Top Overlay "C1" at 335.94,2434.57 h30 r270; Top Overlay "D1" at 235.94,2434.57 h30 r270; Top Overlay "A30" at 750.94,1174.57 h30 r270; Top Overlay "B30" at 625.94,1174.57 h30 r270; Top Overlay "A1" at 730.94,2434.57 h30 r270; Top Overlay "B1" at 630.94,2434.57 h30 r270
HT3: Mechanical 6 "C1" at 3291.81,456.85 h30
J2: Mechanical 6 "9" at 3734.88,3277.19 h30 r180; Mechanical 6 "8" at 3684.88,3377.19 h30 r180; Mechanical 6 "6" at 3584.88,3377.19 h30 r180; Mechanical 6 "5" at 3534.88,3277.18 h30 r180; Mechanical 6 "7" at 3634.88,3277.18 h30 r180; Mechanical 6 "4" at 3484.88,3377.19 h30 r180; Mechanical 6 "3" at 3434.88,3277.18 h30 r180; Mechanical 6 "2" at 3384.88,3377.19 h30 r180; Mechanical 6 "16" at 3864.8,3519.7 h30 r180; Mechanical 6 "15" at 3254.96,3519.7 h30 r180; Mechanical 6 "1" at 3334.88,3277.18 h30 r180
J4: Bottom Overlay "1" at 2665.24,3436.89 h59.06; Bottom Overlay "5" at 2025.24,3431.89 h59.06; Bottom Overlay "9" at 2196.81,3699.13 h59.06; Bottom Overlay "6" at 2523.98,3699.13 h59.06
JTAG: Bottom Overlay "2" at 4136.81,873.94 h30 r270; Bottom Overlay "1" at 4028.54,873.94 h30 r270; Bottom Overlay "9" at 4018.7,1346.38 h30 r270; Bottom Overlay "10" at 4136.81,1336.54 h30 r270
U1: Mechanical 6 "3" at 3661.02,642.24 h30 r180; Mechanical 6 "6" at 3700.39,681.61 h30 r180; Mechanical 6 "5" at 3661.02,681.61 h30 r180; Mechanical 6 "4" at 3661.02,661.93 h30 r180
U3: Bottom Overlay "*" at 655.72,3272.23 h50 r270; Mechanical 13 "*" at 804.72,3330.73 h50 r270
U4: Bottom Overlay "*" at 635,813 h50 r90; Mechanical 13 "*" at 486,754.5 h50 r90